# Altium PCB TI_EVM.PcbDoc
Units mil, origin at the board's own origin, x right, y up, seen from the top; angles counter-clockwise.
Board outline 3543.31 x 2299.21 mil, 2 copper layers (Top Layer, Bottom Layer); 66 components, 32 nets, 162 pads, 44 vias.
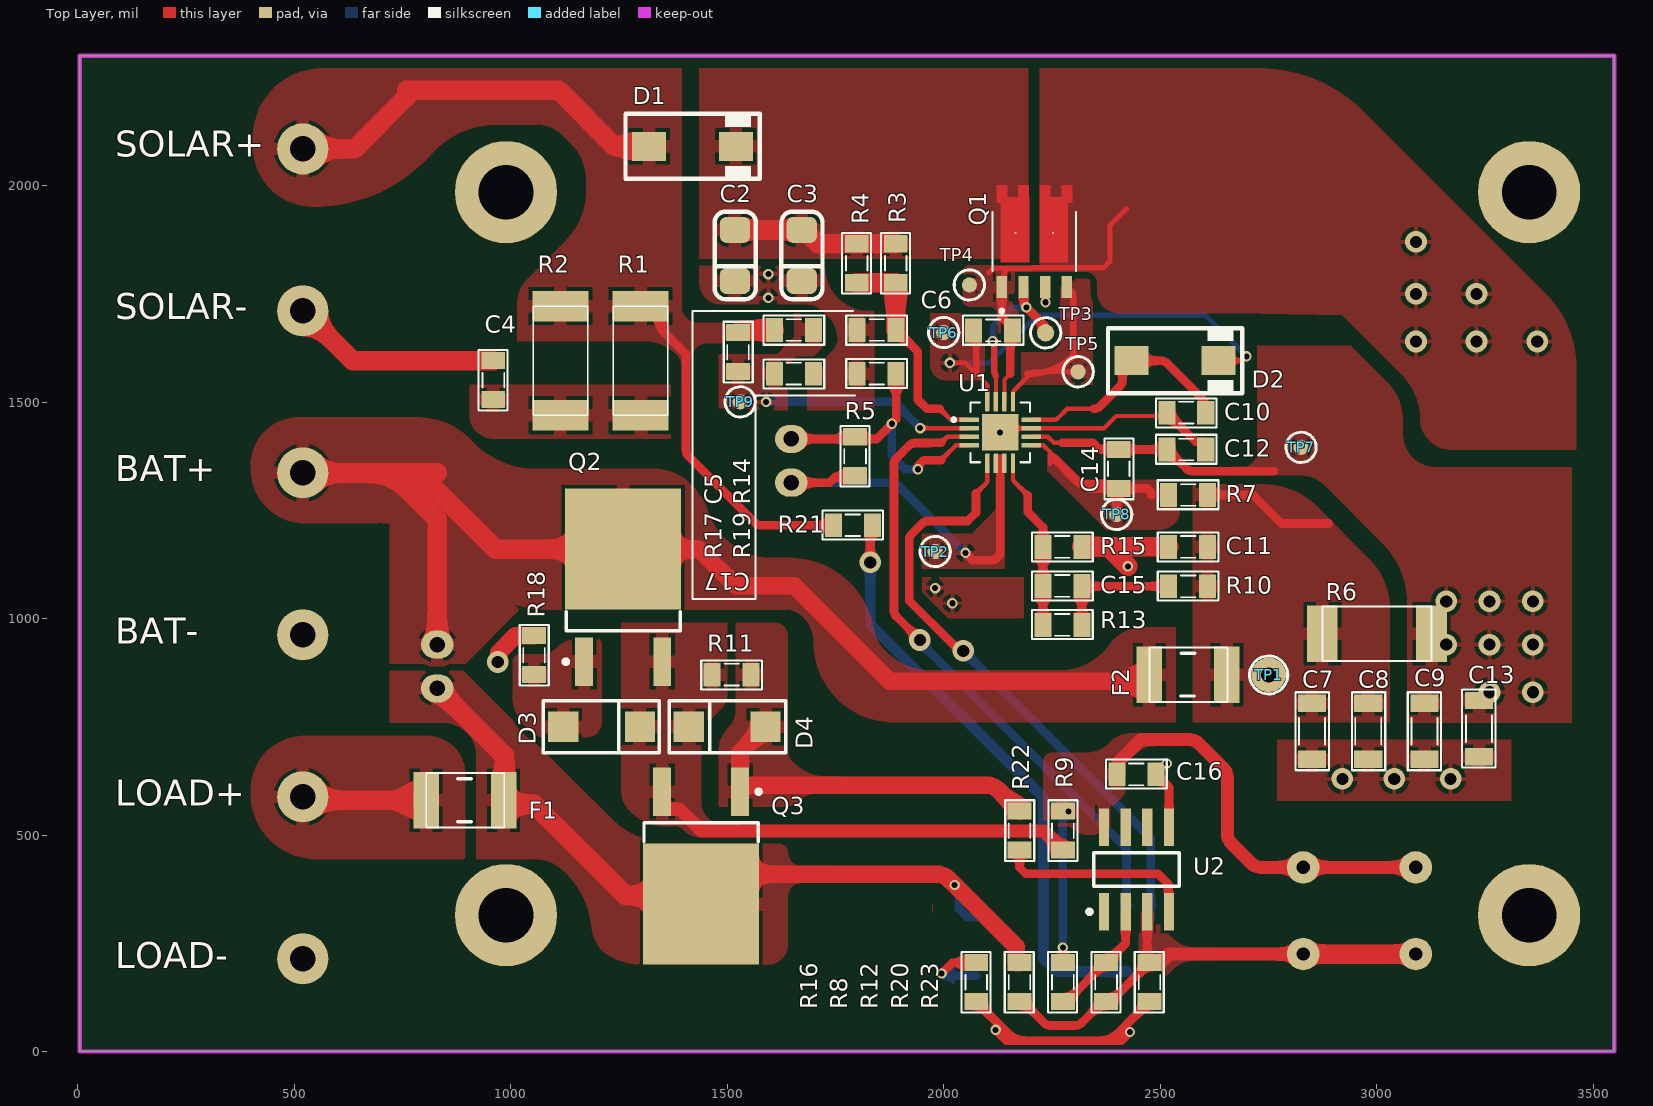
[diagram p0: Top Layer view]
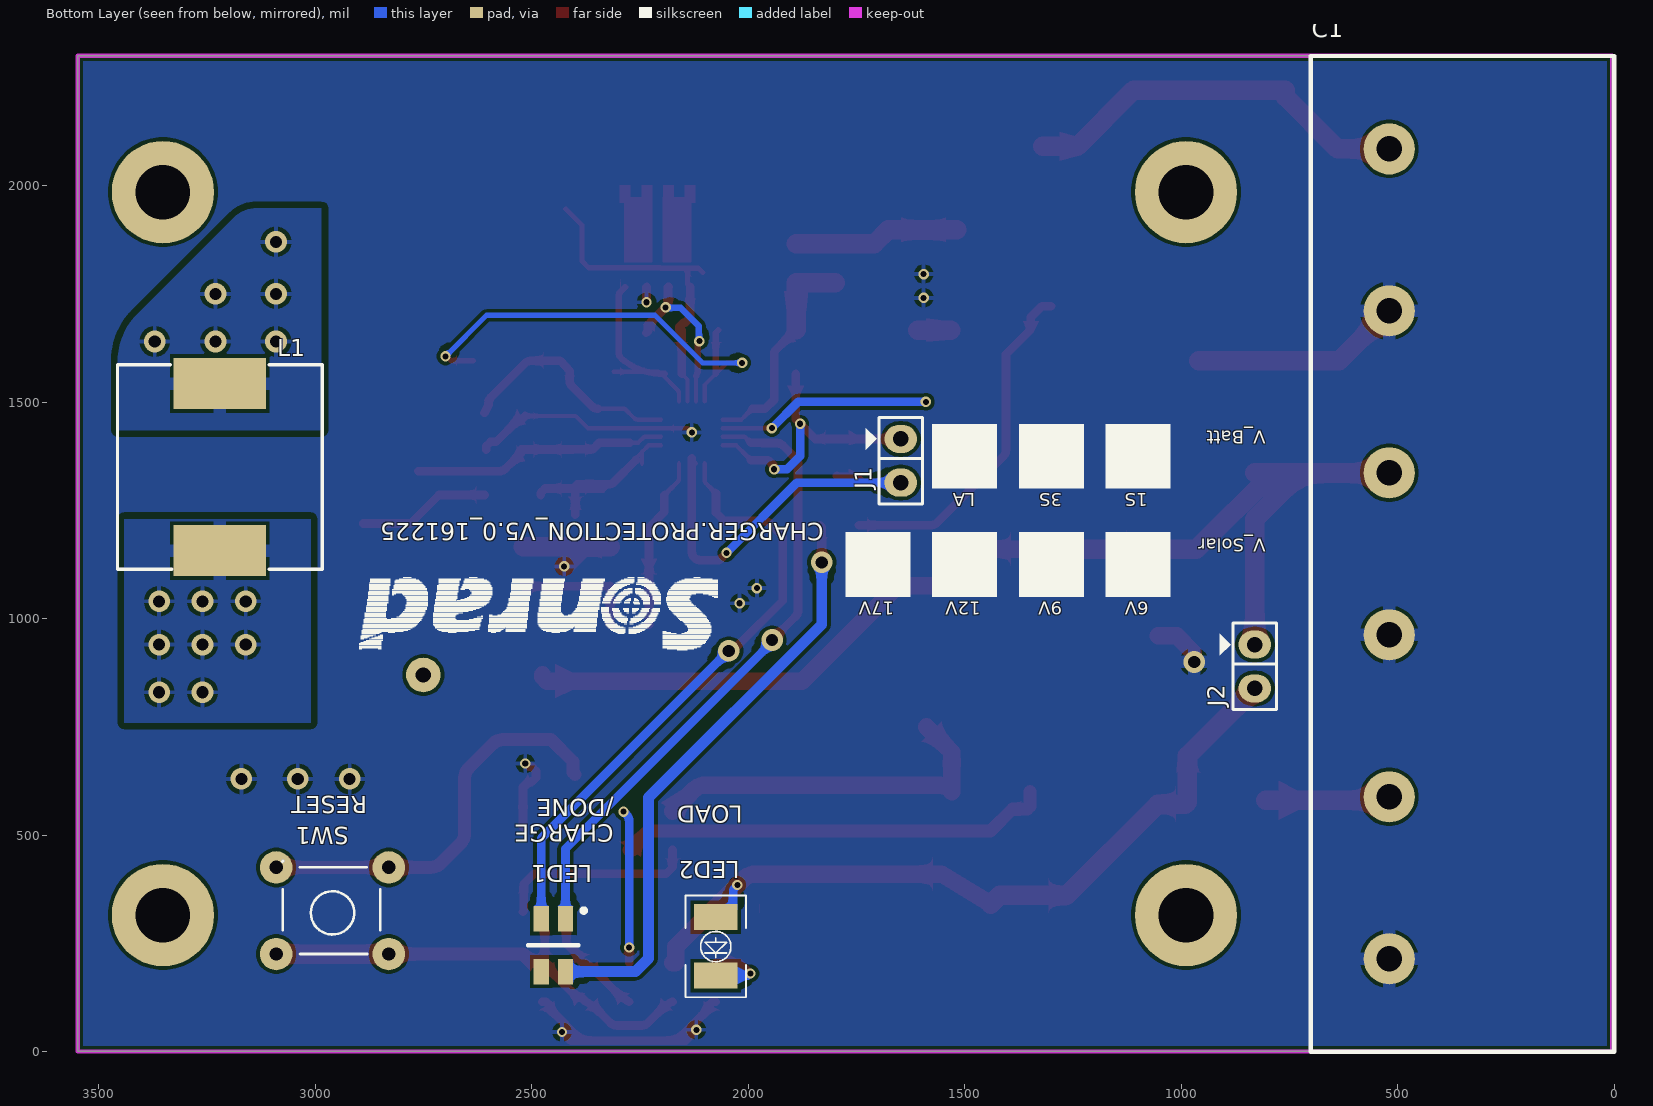
[diagram p1: Bottom Layer view, seen from below]
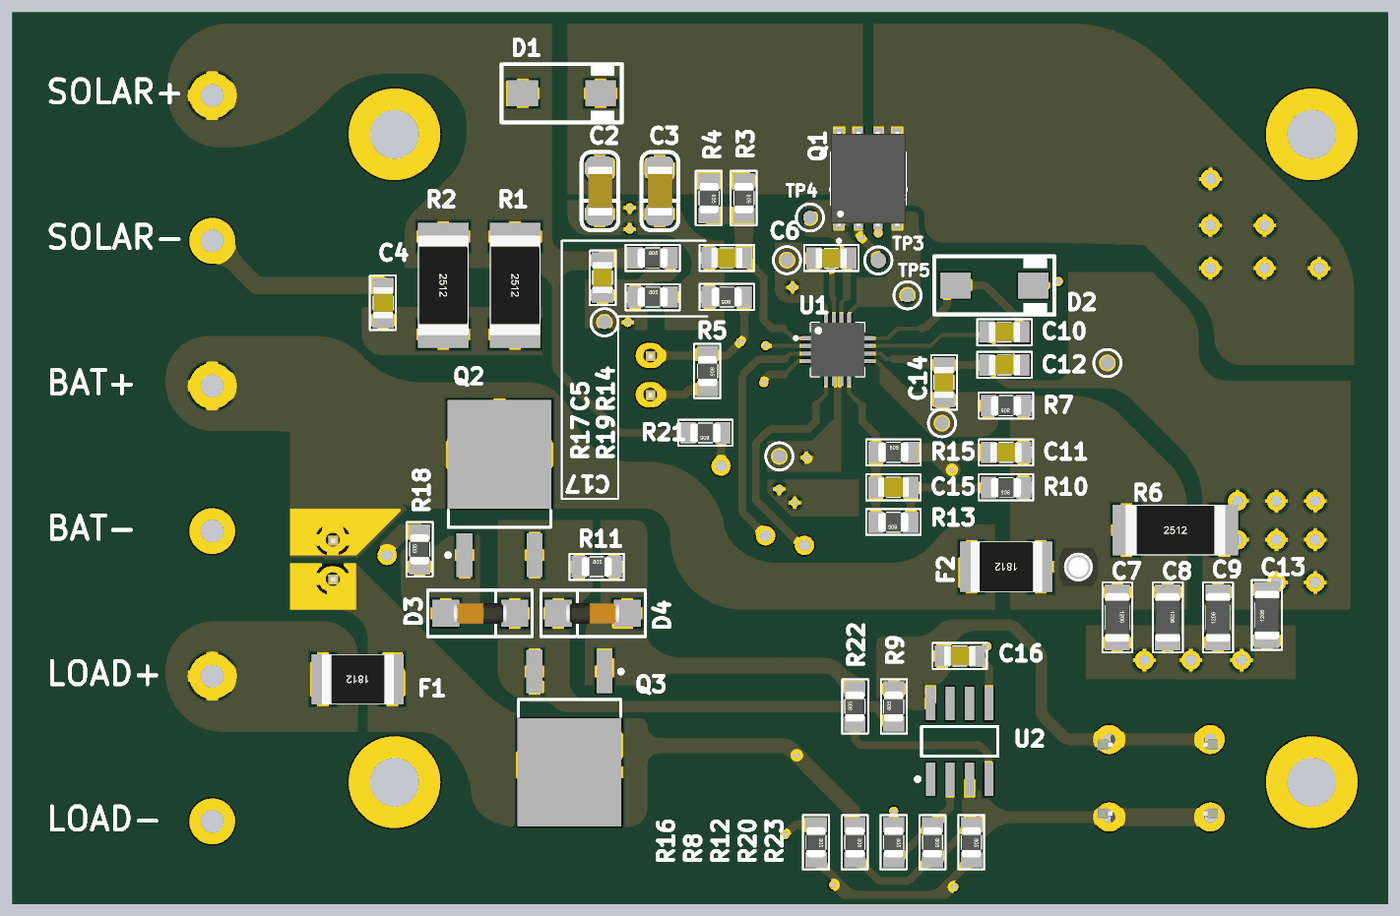
[diagram p2: 3D render of the assembled board from above, using the file's embedded part models]
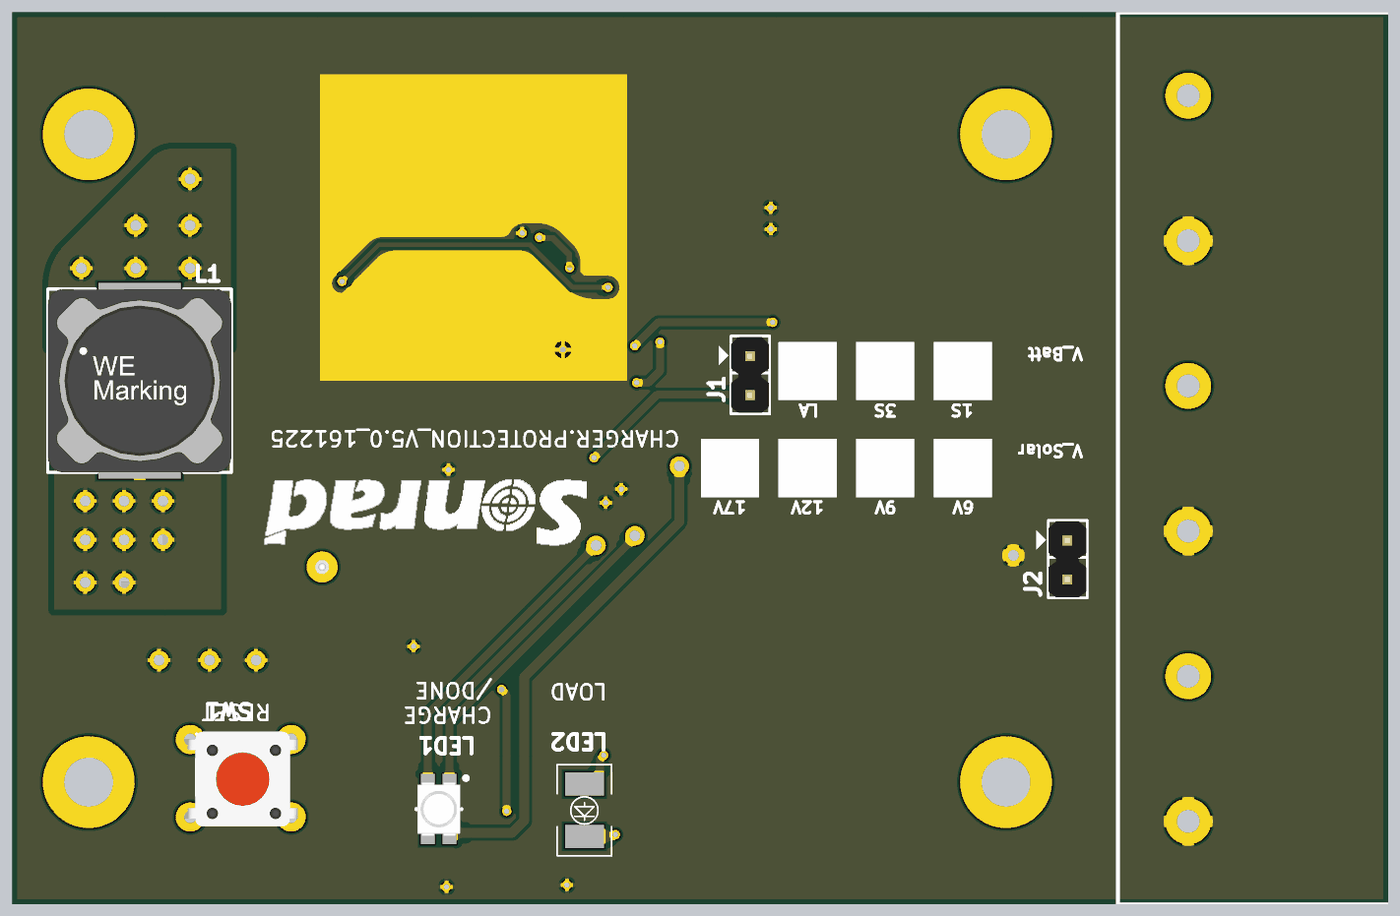
[diagram p3: 3D render of the assembled board from below, using the file's embedded part models]

## Layer stack, top to bottom
Top Solder: solder mask 0.4, Solder Resist, Dk 3.5
Top Layer: signal copper 1.4
Dielectric 1: dielectric 12.6, FR-4, Dk 4.8
Bottom Layer: signal copper 1.4
Bottom Solder: solder mask 0.4, Solder Resist, Dk 3.5

## Board outline
4.69,0.63 4.69,2299.84 3547.99,2299.84 3547.99,0.63

## Design rules (kind name [scope] priority, off if disabled: settings)
Clearance [All] p1: gap=8 ignorepadtopadclearanceinfootprint=FALSE except(0: Arc-Text Track-Text SMDPad-Text SMDPad-Hole THPad-THPad THPad-Text THPad-Hole Via-Text Via-Hole Fill-Text Fill-Hole Poly-Text Poly-Hole Region-Text Region-Hole Text-Text Text-Hole; 2: SMDPad-SMDPad SMDPad-THPad; 12: Arc-Via Track-Via SMDPad-Via THPad-Via Via-Via; 15: Fill-Fill Fill-Poly Fill-Region Poly-Poly Poly-Region Region-Region)
HoleSize [All] p1: absolutevalues=TRUE maxlimit=150 minlimit=1 maxpercent=80.000 minpercent=20.000
MinimumSolderMaskSliver [All] p1: minsoldermaskwidth=0
PlaneClearance [All] p1: clearance=15
PlaneConnect [All] p1: planeconnectstyle=Relief reliefexpansion=30 reliefentries=4 reliefconductorwidth=10 reliefairgap=10
PolygonConnect [All] p1: connectstyle=Relief reliefconductorwidth=30 reliefentries=4 polygonreliefangle="90 Angle" airgapwidth=8
RoutingVias [All] p1: holewidth=28 width=50 viastyle="Through Hole" minholewidth=10 minwidth=20 maxholewidth=28 maxwidth=50
SilkToSilkClearance [All] p1: silktosilkclearance=1
SilkToSolderMaskClearance [IsPad] p1: minsilkscreentomaskgap=0 clearancetoexposedcopper=TRUE
SolderMaskExpansion [All] p1: expansion=4 istentingtop=FALSE
SupplyNets "Schematic Supply Nets_1" [InNet('TERM_EN')] p1: voltage=0.000
SupplyNets "Schematic Supply Nets_5" [InNet('GND')] p2: voltage=0.000
Width [All] p1: maxlimit=45 minlimit=10 preferedwidth=20 bottomlayer_minwidth=12 minimp=50.000000 maximp=50.000000 favimp=50.000000
24 further rules are at their usual default settings.

## Components (designator, comment, footprint, x,y, rotation, side; value= is the part's Value field where it differs from the comment)
C1 "JP6" HB9500-6P 700.79,2299.21 r270 bottom locked
C2 "10uF" CAP_3216 1519.68,1840.63 r90 top value=33p
C3 "10uF" CAP_3216 1673.83,1840.63 r90 top value=33p
C4 "2.2uF" CAP_0805 959.68,1550.63 r270 top value=33p
C5 "0.1uF" CAP_0805 1844.68,1666.63 r0 top value=33p
C6 "1uF" CAP_0805 2113.83,1665.63 r180 top value=33p
C7 "4.7uF" CAP_1206 2850,740 r270 top value=33p
C8 "1uF" CAP_1206 2980,740 r270 top value=33p
C9 "10uF" CAP_1206 3110,740 r90 top value=33p
C10 "10uF" CAP_0805 2559.68,1475.63 r0 top value=33p
C11 "0.1uF" CAP_0805 2563.83,1165.63 r0 top value=33p
C12 "10uF" CAP_0805 2559.68,1390.63 r180 top value=33p
C13 "10uF" CAP_1206 3235.63,746.17 r90 top value=33p
C14 "10uF" CAP_0805 2403.83,1345.63 r90 top value=33p
C15 "0.1uF" CAP_0805 2273.83,1075.63 r0 top value=33p
C16 "0.47uF" CAP_0805 2444.68,640.63 r180 top value=33p
C17 "22pF" CAP_0805 1524.68,1615.63 r90 top value=33p
D1 "1N5824" SMA 1419.68,2090.63 r0 top value="Diode c?m 1N5408"
D2 "1N5819" SMA 2533.83,1595.63 r0 top value="Diode c?m 1N5408"
D3 "Zenner 12V" DIODE_ZENER_SMD 1209.68,750.63 r0 top
D4 "Zenner 12V" DIODE_ZENER_SMD 1499.68,750.63 r180 top
F1 "F5A" RES-SMD-1812 904.68,580.63 r180 top value=Fuse
F2 "F5A" RES-SMD-1812 2574.68,870.63 r180 top value=Fuse
J1 "Jumper 2" JP2 1647.5,1415 r270 bottom value="JP 2"
J2 "Jumper 2" JP2 830,940 r270 bottom value="JP 2"
L1 "15uH" L-SMD-M-12x10 3220,1350 r180 bottom value="150 mH"
LED1 "LED RGB SMD v1" "LED RGB 3528" 2449.68,246.04 r270 bottom locked
LED2 "LED" "LED 3512" 2074.68,310.63 r270 bottom locked value="LED 3 - 5 ly 2 Colour"
Q1 "SI7288" "SO-8 dual" 2208.83,1870.75 r90 top
Q2 "Sud50p06" TO-252 1259.53,1065.98 r90 top
Q3 "Sud50p06" TO-252 1439.53,435.28 r270 top
R1 "2R" RES-SMD-2512 1294.68,1595.63 r270 top
R2 "2R" RES-SMD-2512 1109.68,1595.63 r270 top
R3 "10R" RES-SMD-0805 1888.83,1820.63 r270 top
R4 "NC" RES-SMD-0805 1798.83,1820.63 r270 top
R5 "10k" RES-SMD-0805 1795,1375 r270 top
R6 "0.05" RES-SMD-2512 3000,960 r0 top
R7 "0R" RES-SMD-0805 2563.83,1285.63 r180 top
R8 "DFN" RES-SMD-0805 2174.68,160.63 r270 top
R9 "10R" RES-SMD-0805 2274.68,510.63 r90 top
R10 "0R" RES-SMD-0805 2563.83,1074.63 r180 top
R11 "1M" RES-SMD-0805 1509.68,870.63 r0 top
R12 "100k" RES-SMD-0805 2274.68,160.63 r270 top
R13 "499k" RES-SMD-0805 2273.83,985.63 r180 top
R14 "10k" RES-SMD-0805 1844.68,1565.63 r180 top
R15 "100k" RES-SMD-0805 2273.83,1165.63 r0 top
R16 "10k" RES-SMD-0805 2074.68,160.63 r270 top
R17 "499k" RES-SMD-0805 1653.83,1666.63 r0 top
R18 "100k" RES-SMD-0805 1053.68,915.63 r90 top
R19 "36k" RES-SMD-0805 1653.83,1565.63 r0 top
R20 "1M" RES-SMD-0805 2374.68,160.63 r270 top
R21 "1k" RES-SMD-0805 1789.68,1215.63 r180 top
R22 "100R" RES-SMD-0805 2174.68,510.63 r90 top
R23 "115k" RES-SMD-0805 2474.68,160.63 r270 top
SW1 "SW" SW4 2829.68,225.63 r0 bottom locked value="Button chip 4 pin"
TP1 "TP" TP1 2750,870 r0 top value="Test Point"
TP2 "TP" "Testpoint 50ml"#1 1980,1155 r0 top value="Test Point"
TP3 "TP" "Testpoint 50ml"#2 2235,1660 r0 top value="Test Point"
TP4 "TP" "Testpoint 50ml"#1 2058.83,1770.63 r0 top value="Test Point"
TP5 "TP" "Testpoint 50ml"#1 2310,1570 r0 top value="Test Point"
TP6 "TP" "Testpoint 50ml"#1 1999.68,1660.63 r0 top value="Test Point"
TP7 "TP" "Testpoint 50ml"#1 2824.68,1395.63 r0 top value="Test Point"
TP8 "TP" "Testpoint 50ml"#1 2398.83,1240.63 r0 top value="Test Point"
TP9 "TP" "Testpoint 50ml"#1 1529.68,1500.63 r0 top value="Test Point"
U1 "BQ24650" VQFN-16 2130,1430 r0 top
U2 "MAX8212" SOIC-8 2444.68,420.63 r90 top

## Footprints (in the part's own frame and the unit in brackets; to place one, negate y for a bottom-side part, rotate by r counter-clockwise, add the part's x,y. Pads: shape width x height; smd on the part's side, far side on the other; paste and mask are expansions set on the pad)
CAP_0805 [mil]
  rect 39.37x55 smd: 1(-45,0) 2(45,0)
  silkscreen extent -70,-34 70,33, body extent -40,-25 40,25, height 24
CAP_1206 [mil]
  rect 40x65 smd: 1(-65,0) 2(65,0)
  silkscreen extent -90,-38 90,39, body extent -63,-31 63,32, height 40
CAP_3216 [mil]
  rrect50% 60x70 smd: 1(-60.99,2) 2(56.99,2)
  silkscreen extent -103,-46 99,49, body extent -65,-30 61,32, height 39
DIODE_ZENER_SMD [mil]
  rect 70x70 smd: 1(-88.58,0) 2(88.58,0)
  silkscreen extent -135,-60 134,60, body extent -69,-29 69,29, height 57
HB9500-6P [mm]
  round 3 hole 1.5: 1(5.45,4.6) 2(14.95,4.6) 3(24.45,4.6) 4(33.95,4.6) 5(43.45,4.6) 6(52.95,4.6)
  silkscreen extent 0,0 58.4,17.8
JP2 [mil]
  oval 65x75 hole 36: 1(0,0) 2(101,0)
  silkscreen extent -50,-81 150,50, body extent -48,-50 148,48, height 323
L-SMD-M-12x10 [mm] "WE-PDA SMD Shielded Power Inductor, 1210"
  rect 5.4x3 smd: 1(0,4.9) 2(0,-4.9)
  silkscreen extent -6,-6 6,6, body extent -6,-6 6,6, height 9.7
"LED 3512" [mil]
  rect 60x100 smd: 1(-0.2,0) 2(134.8,0)
  silkscreen extent -50,-70 185,70, body extent -20,-60 155,60, height 75
"LED RGB 3528" [mm]
  rect 1.5x0.9 smd: 1(1.55,0.707) 2(1.55,-0.71) 3(-1.55,0.707) 4(-1.55,-0.707)
  silkscreen extent -2.15,-1.5 0.03,1.9, body extent -1.75,-1.4 1.75,1.4, height 1.87
RES-SMD-0805 [mil]
  rect 39.37x55 smd: 1(-45,0) 2(45,0)
  silkscreen extent -70,-34 70,33, body extent -39,-25 39,25, height 31
RES-SMD-1812 [mm] "Chip Capacitor, Body 3.2x2.5mm, IPC Medium Density"
  rect 1.5x3.3 smd: 1(-1.996,0) 2(2.54,0)
  silkscreen extent -2.04,-1.6 2.54,1.6, body extent -2,-1.6 2.5,1.6, height 0.6
RES-SMD-2512 [mm] "Chip Capacitor, Body 3.2x2.5mm, IPC Medium Density"
  rect 1.8x3.3 smd: 1(-3.2,0.127) 2(3.2,0.127)
  silkscreen extent -3.2,-1.47 3.2,1.73, body extent -3.2,-1.47 3.2,1.73, height 0.6
SMA [mm]
  rect 2x1.7 smd: 1(-2.544,0) 2(2.544,0)
  silkscreen extent -3.94,-1.9 3.94,1.91, body extent -2.87,-1.4 2.87,1.4, height 2.29
"SO-8 dual" [mm] "Dual N-channel"
  rect 1.27x0.61 smd: 1(-2.67,1.905) 2(-2.67,0.635) 3(-2.67,-0.635) 4(-2.67,-1.905)
  rect 0.1x0.1 smd paste-1 mask+0: 5_6_10(0.5,-1.1) 7_8_9(0.5,1.1)
  Top Layer region: 2.6,-0.33 3.305,-0.33 3.305,-0.94 2.6,-0.94 2.6,-1.6 3.305,-1.6 3.305,-2.21 2.285,-2.21 2.285,-1.955 -1.215,-1.955 -1.215,-0.305 2.6,-0.305
  Top Layer region: 3.305,1.6 2.6,1.6 2.6,0.94 3.305,0.94 3.305,0.33 2.6,0.33 2.6,0.305 -1.215,0.305 -1.215,1.955 2.285,1.955 2.285,2.21 3.305,2.21
  silkscreen extent -4.17,-2.45 1.72,2.45, body extent -3.07,-2.58 3.07,2.58, height 1.12
SOIC-8 [mm] "SOIC, 8-Leads, Body 5,0x4,0mm (max), Pitch 1,27mm, IPC Medium Density"
  rect 2.2x0.6 smd: 1(-2.475,1.905) 2(-2.475,0.635) 3(-2.475,-0.635) 4(-2.475,-1.905) 5(2.475,-1.905) 6(2.475,-0.635) 7(2.475,0.635) 8(2.475,1.905)
  silkscreen extent -2.6,-2.5 0.98,2.88, body extent -3.2,-2.5 3.2,2.5, height 1.75
SW4 [mil] "SW button 4pin, 250 x250 mil"
  round 75 hole 31: 1(0,0) 2(0,-200) 3(260,-200) 4(260,0)
  silkscreen extent 20,-215 245,0, body extent -31,-220 281,24, height 276
"Testpoint 50ml"#1 [mil]
  round 35 smd: 1(0,0)
  silkscreen extent -35,-35 35,35
"Testpoint 50ml"#2 [mil]
  round 40 smd: 1(0,0)
  silkscreen extent -35,-35 35,35
TO-252 [mm] "KVU D-PAK, 3-Pads, Body 6,2x6,7mm (max), IPC Medium Density"
  rect 2.85x1.05 smd: 1(-4.2,2.29) 3(-4.2,-2.29)
  rect 7.1x6.8 smd: 2(2.4,0)
  silkscreen extent -4.32,-3.35 -1.27,3.49, body extent -5.03,-3.35 5.08,3.35, height 2.4
TP1 [mil] "Test point"
  round 80 hole 35: 1(0,0)
  silkscreen extent -44,-44 44,44, body extent -50,-50 50,50, height 178
VQFN-16 [mm]
  rrect25% 1.143x0.26 smd: 1(-1.812,0.75) 2(-1.812,0.25) 3(-1.812,-0.25) 4(-1.812,-0.75) 9(1.812,-0.75) 10(1.812,-0.25) 11(1.812,0.25) 12(1.812,0.75)
  rrect25% 0.26x1.143 smd: 5(-0.75,-1.812) 6(-0.25,-1.812) 7(0.25,-1.812) 8(0.75,-1.812) 13(0.75,1.812) 14(0.25,1.812) 15(-0.25,1.812) 16(-0.75,1.812)
  rect 2.14x2.14 smd paste-0.39: 17(0,0)
  silkscreen extent -2.82,-1.75 1.75,1.75, body extent -1.75,-1.75 1.75,1.75, height 1

## Part data
C1: "WR-PHD 2.54 mm Angled Socket Header", Manufacturer="W¨¹rth Elektronik eiSos GmbH", partNo=613006143121, ComponentLink1 Description=Manufacturer, ComponentLink1URL=http://www.we-online.com, ComponentLink2 Description=Datasheet, ComponentLink2URL=http://katalog.we-online.de/em/datasheet/6130xx143121.pdf, Created by="Karrer Zheng", Created Date="29 March 2013", NoPins=06
C2 C3: library part CapSMD, "Capacitor", LatestRevisionDate=17-Jul-2002, LatestRevisionNote="Re-released for DXP Platform.", PackageReference=RAD-0.3, Published=8-Jun-2000, Publisher="Altium Limited"
C4 C5 C6 C10 C11 C12 C14 C15 C16 C17: library part CapSMD, "C_0805", LatestRevisionDate=17-Jul-2002, LatestRevisionNote="Re-released for DXP Platform.", PackageReference=RAD-0.3, Published=8-Jun-2000, Publisher="Altium Limited"
C7 C8 C9 C13: library part CapSMD, "C_1206", LatestRevisionDate=17-Jul-2002, LatestRevisionNote="Re-released for DXP Platform.", PackageReference=RAD-0.3, Published=8-Jun-2000, Publisher="Altium Limited"
D1: library part 1N5822, "SS54 Diode Schottky 5A 40V"
D2: library part 1N5822, "S4 Diode Schottky 1A 40V"
D3 D4: library part Zenner, "generic zenner diode"
F1 F2: library part Fuse, "Fuse 5A", Designed by=VanDungEvn
J1 J2: library part "JP 2"
L1: library part Inductor, "Inductor"
LED2: library part "LED SMD"
Q1: library part "Dual MOSFET-N", "Si7288"
Q2 Q3: library part MOSFET-P
R1 R2 R6: library part "Resistor - SMD", "R_2512", Manufacturer="Generic Components", Class=Passive, Published=08/06/2000, Publisher="Altium Hobart Technology Centre"
R3 R4 R5 R7 R8 R9 R10 R11 R12 R13 R14 R15 R16 R17 R18 R19 R20 R21 R22 R23: library part "Resistor - SMD", "R_0805", Manufacturer="Generic Components", Class=Passive, Published=08/06/2000, Publisher="Altium Hobart Technology Centre"
SW1: library part SW4, "Switch button 4 pin"
TP1: library part TP1, "Test Point"
TP2 TP3 TP4 TP5 TP6 TP7 TP8 TP9: library part TP_1, "Test Point"
U1: "BQ24650 Stand-Alone Synchronous Buck Battery Charge Controller for Solar Power / With Maximum Power Point Tracking"
U2: "Microprocessor Voltage Monitors  / with Programmable Voltage Detection"

## Free pads (board coordinates)
  round 236.22 hole 125.98: 14(988.94,315.59) 14(988.94,1984.88) 14(3351.14,315.59) 14(3351.14,1984.88)

## Via types
v1: diameter 24, hole 14, Top Layer to Bottom Layer, 23 vias
v2: diameter 50, hole 28, Top Layer to Bottom Layer, 21 vias

## Nets (pads, with @x,y where several pads share a name; then routed paths per layer and width w, separated by ;. In a path a pad name is that pad's centre, name@x,y a point inside that pad or via, vN(x,y) a via of type N, cw(c..) or ccw(c..) an arc to the next point about the centre after c; other vN are vias at no path point)
BTST: C6.2 D2.2 TP6.1 U1.16 | length 1087.4
  Top Layer w10: v1(2013.83,1590.63) 2049.37,1590.63 2100.47,1539.53 U1.16
  Top Layer w12: D2.2 2686.25,1595.63 2696.25,1605.63 v1(2698.83,1605.63)
  Top Layer w15: C6.2 2074.78,1659.68 2074.78,1565.63
  Bottom Layer w12: v1(2013.83,1590.63) 2104.68,1590.63 2214.68,1700.63 2603.83,1700.63 v1(2698.83,1605.63)
GND: C1.2 C1.4 C1.6 C2.1 C3.1 C4.1 C5.1 C7.2 C8.2 C9.1 C10.1 C11.1 C12.1 C13.1 C16.1 Q1.3 R14.2 R15.2 R16.2 R18.2 R19.2 R23.2 U1.11 U1.17 U2.5 | length 2203.8
  Top Layer w10: v1(2130,1430) 2139.57,1439.57 2183.68,1439.57 2183.96,1439.84 U1.11 2369.84,1439.84 2397.82,1467.82 C10.1@2514.68,1467.82
  Top Layer w20: R16.2 2082.5,115.63 2092.18,105.95 2092.18,98.13 2164.69,25.63 ; v1(2119.68,50.63) 2144.68,25.63 2164.69,25.63 ; Q1.3 2234.68,1764.77 v1(2234.68,1730.63) ; v1(2429.68,45.63) 2409.68,25.63 2384.68,25.63 ; R23.2 2466.87,115.63 2457.18,105.95 2457.18,98.13 2384.68,25.63 ; v1(2514.68,665.63) 2513.6,665.63 2506.1,658.13 2499.37,658.13 2489.69,648.44 C16.1 2489.69,632.82 2499.37,623.13 2507.19,623.13 2519.68,610.63 U2.5 ; C10.1@2514.68,1467.82 2524.37,1458.13 2532.18,1458.13 2582.18,1408.13 2595,1408.13 2604.69,1398.44 C12.1 ; 2164.69,25.63 2384.68,25.63
  Top Layer w40: v2(970,900) 971.91,901.91 971.91,921.91 1010.63,960.63 R18.2
  Top Layer w45: C1.2 634.68,1595.63 C4.1 ; R15.2 2384.68,1165.63 ; v1(2424.68,1120.63) 2384.68,1160.63 2384.68,1165.63 ; C11.1 2384.68,1165.63
  other v1: 2019.68,1035.63 1979.68,1070.63 1594.68,1740.63 1594.68,1795.63
  other v2: 2920,630 3040,630 3170,630
HIDRV: Q1.2 TP3.1 U1.15 | length 396.8
  Top Layer w10: U1.15 2120.16,1559.62
  Top Layer w15: v1(2112.51,1640.88) cw(c2100.77,1631.55) 2115.77,1631.55 2115.77,1573.11 ccw(c2130.77,1573.16) 2116.9,1567.45 2120.16,1559.62
  Top Layer w20: Q1.2 2184.96,1764.5 2184.96,1725.58 2190.54,1720 v1(2190.54,1718.91) ; v1@2191.31,1718.15 2231.17,1678.28 2231.17,1663.83 TP3.1
  Bottom Layer w15: v1(2112.51,1640.88) 2113.58,1641.95 2113.58,1675.38 2156.04,1717.85 2189.47,1717.85 v1(2190.54,1718.91)
LODRV: Q1.4 TP5.1 U1.13 | length 472.2
  Top Layer w10: U1.13 2159.65,1518.84 2159.66,1520.64 cw(c2169.66,1520.56) 2162.57,1527.61 2199.63,1564.67 cw(c2206.72,1557.62) 2199.71,1564.76 2202.14,1567.14 cw(c2209.14,1560) 2209.06,1570 ; 2209.1,1570 2234.34,1570 TP5.1
  Top Layer w15: 2192.89,1565.63 ccw(c2198.97,1706.73) 2293.96,1602.22 ccw(c2283.83,1613.28) 2298.83,1613.23 2298.83,1744.41 ccw(c2283.83,1744.41) 2294.44,1755.01 2288.33,1761.12 Q1.4
MPPSET: C17.1 R17.2 R19.1 TP9.1 U1.2 | length 494.2
  Top Layer w10: v1(1945,1440) 2038.71,1440 2038.75,1439.96 2058.54,1439.96 U1.2
  Bottom Layer w20: v1(1589.68,1500.63) 1884.37,1500.63 v1(1945,1440)
NetC1_5: C1.5 F1.2 | length 293
  Top Layer w45: C1.5 519.68,580.63 F1.2
NetC2_2: C2.2 C3.2 D1.2 Q1.7_8_9 R3.1 R4.1 | length 384.4
  Top Layer w45: C2.2 C3.2 1676.83,1897.62 1708.82,1865.63 R4.1 R3.1
NetC4_2: C4.2 R1.2 R2.2
NetC5_2: C5.2 R3.2 R4.2 U1.1 | length 523.7
  Top Layer w10: 1990,1485 2015.47,1459.53 U1.1
  Top Layer w20: C5.2@1888.83,1667.49 1888.83,1659.67 1899.37,1649.13 1907.18,1649.13 1939.68,1616.63 1939.68,1505.63 1960.32,1485 1990,1485
  Top Layer w45: R4.2 R3.2 C5.2@1888.83,1667.49
NetC7_1: C7.1 C8.1 C11.2 F2.1 R6.1 R7.1 R10.1 TP1.1 | length 307.3
  Top Layer w20: R7.1 2713.83,1285.63 2779.8,1219.65 2888.83,1219.65
NetC10_2: C10.2 D2.1 U1.12 | length 538.4
  Top Layer w10: U1.12 2255.39,1459.53 ccw(c2255.39,1469.53) 2261.39,1461.53 ccw(c2255.39,1469.53) 2262.44,1462.44 2284.68,1484.68 2346.4,1484.68
  Top Layer w20: 2346.4,1484.68 ccw(c2346.4,1504.68) 2358.4,1488.68 ccw(c2346.4,1504.68) 2360.5,1490.5 2406.25,1536.25 ccw(c2392.08,1550.36) 2412.08,1550.36 2412.08,1572.17 D2.1 2501.09,1595.63 cw(c2501.09,1575.63) 2515.2,1589.8 2593.62,1511.38 cw(c2579.45,1497.27) 2599.45,1497.27 2599.45,1493.13 C10.2@2608.83,1475.63
NetC15_1: C15.1 R13.2 R15.1 U1.8 | length 401.3
  Top Layer w10: U1.8 2159.53,1323.13 ccw(c2169.53,1323.13) 2162.44,1316.07 2193.39,1285.13
  Top Layer w20: 2193.39,1285.13 2193.39,1246.07 2228.83,1210.63 R13.2
NetC15_2: C15.2 R10.2 R13.1 | length 289
  Top Layer w20: R13.1 2318.83,1057.13 C15.2 ; C15.2@2319.83,1074.63 R10.2
NetC16_2: C16.2 R9.2 R12.1 SW1.2 SW1.3 U2.8 | length 1297.9
  Top Layer w20: R12.1 v1(2274.68,240.63)
  Top Layer w30: C16.2 2404.37,645.32 2404.37,670.32 2454.68,720.63 2566.94,720.63 cw(c2566.94,690.63) 2584.94,714.63 cw(c2566.94,690.63) 2588.13,711.87 2645.92,654.08 cw(c2624.68,632.89) 2648.68,650.89 cw(c2624.68,632.89) 2654.68,632.89 2654.68,502.74 ccw(c2684.68,502.74) 2660.69,484.74 ccw(c2684.69,502.74) 2663.45,481.55 2710.61,434.39 ccw(c2731.8,455.63) 2713.8,431.63 ccw(c2731.8,455.63) 2731.8,425.63 SW1.2 SW1.3
  Bottom Layer w20: v1(2274.68,240.63) 2274.68,532.97 cw(c2294.68,532.97) 2280.51,547.08 v1@2287.07,553.64
  other v1: 2287.83,554.4
NetD3_1: D3.1 Q2.1 R18.1
NetD3_2: D3.2 D4.2 Q2.3 Q3.3 R9.1 R11.1 | length 1006
  Top Layer w30: Q3.3 1349.37,566.09 1355.04,560.42 1389.58,560.42 1439.87,510.13 2230.18,510.13 2262.18,478.13 2262.18,470.31 2266.87,465.63 R9.1
NetD4_1: D4.1 Q3.1 R11.2 R22.2 | length 848.4
  Top Layer w40: Q3.1@1529.68,614.96 Q3.1 1530.35,606.34 1546.37,612.76 cw(c1561.25,575.63) 1561.25,615.63 2098.11,615.63 cw(c2098.11,575.63) 2126.4,603.91 R22.2 ; Q3.1@1529.68,615.63 1529.68,692.05 D4.1
NetJ1_1: J1.1 R5.1 R14.1 U1.4 | length 632.5
  Top Layer w10: 1993.33,1366.07 2027.73,1400.47 U1.4
  Top Layer w20: J1.1@1675,1415 1845,1415 v1(1880,1450) 1880,1451.08 1889.69,1460.77 R14.1 ; v1(1940,1345) 1940.77,1345.77 1940.77,1353.12 1953.72,1366.07 1993.33,1366.07
  Bottom Layer w20: v1(1880,1450) 1880,1375 1910,1345 v1(1940,1345)
NetLED1_1: LED1.1 R21.1 | length 1372.3
  Top Layer w20: v2(1830,1130) 1830,1210.94 R21.1
  Bottom Layer w25: v2(1830,1130) 1830,986.7 2229.68,587.02 2229.68,215.63 2260.3,185.02 LED1.1
NetLED1_3: LED1.3 U1.3 | length 1474.3
  Top Layer w10: 1993.83,1405.94 2008.04,1420.16 U1.3
  Top Layer w20: v2(1944.68,950.63) 1890.54,1004.77 1890.51,1004.81 cw(c1904.69,1018.91) 1888.69,1006.91 cw(c1904.68,1018.91) 1884.68,1018.91 1884.68,1356.4 cw(c1904.68,1356.4) 1888.68,1368.4 cw(c1904.69,1356.4) 1890.51,1370.51 1919.61,1399.61 cw(c1933.72,1385.44) 1933.72,1405.44 1968.83,1405.44 1993.83,1405.94
  Bottom Layer w20: v2(1944.68,950.63) 1944.68,945.63 2190.56,699.75 2421.83,468.48 LED1.3
NetLED1_4: LED1.4 U1.5 | length 1418.4
  Top Layer w10: 2074.28,1289.28 2097.56,1312.56 ccw(c2090.47,1319.61) 2098.47,1313.61 ccw(c2090.47,1319.61) 2100.47,1319.61 U1.5
  Top Layer w20: v2(2044.68,925.63) 2036.57,925.63 2021.94,940.25 2021.53,940.25 1919.68,1042.1 1919.68,1181.4 cw(c1939.68,1181.4) 1923.68,1193.4 cw(c1939.69,1181.4) 1925.51,1195.51 1949.81,1219.81 cw(c1963.91,1205.63) 1951.91,1221.63 cw(c1963.91,1205.63) 1963.91,1225.63 2054.68,1225.63 2074.28,1245.22 2074.28,1289.28
  Bottom Layer w20: v2(2044.68,925.63) 2477.54,492.78 LED1.4
NetLED2_2: LED2.2 R16.1 | length 172.3
  Top Layer w20: v1(1994.68,180.63) 2019.69,205.63 R16.1
  Bottom Layer w20: v1(1994.68,180.63) 1995.77,180.63 2000.56,175.83 LED2.2
NetR8_2: R8.2 R20.2 R23.1 SW1.1 SW1.4 U2.3 | length 1125.6
  Top Layer w20: R8.2 2192.18,105.95 2231.68,66.45 ccw(c2245.79,80.63) 2233.79,64.63 ccw(c2245.79,80.63) 2245.79,60.63 2303.58,60.63 ccw(c2303.58,80.63) 2315.58,64.63 ccw(c2303.58,80.63) 2317.69,66.45 2357.18,105.95 R20.2 2384.37,125.32 2394.37,125.32 2457.18,188.13 2457.18,195.95 2466.87,205.63 R23.1 2469.68,210.63 U2.3
  Top Layer w30: R23.1 2477.05,207.99 2502.05,207.99 2519.68,225.63 SW1.1
  Top Layer w45: SW1.1 SW1.4
NetR12_2: R12.2 R20.1 U2.2 | length 276
  Top Layer w20: R12.2 2292.18,125.32 2362.81,195.95 R20.1 2382.5,205.63 2392.18,215.32 2392.18,223.13 2419.68,250.63 U2.2
NetR22_1: R22.1 U2.4 | length 464
  Top Layer w20: R22.1 2174.68,425.63 2189.68,410.63 2494.69,410.63 2517.87,387.44 2517.87,325 U2.4
PH: C6.1 L1.1 Q1.1 Q1.5_6_10 TP4.1 U1.14 | length 761.9
  Top Layer w10: U1.14 2139.84,1551.96 2153.52,1565.63
  Top Layer w12: 2104.81,1799.08 2114.65,1808.91 2147.11,1808.91 ; Q1.1 2139.83,1771.64 2139.83,1801.64 2147.11,1808.91 ; 2420.91,1945.63 2383.81,1908.53 2383.81,1825.62 2368.44,1810.24 2203.94,1810.24 2202.62,1808.91 2147.11,1808.91
  Top Layer w20: Q1.1 2133.83,1694.85 2145.54,1683.13 2149.14,1683.13 2158.83,1673.44 C6.1 2153.52,1665.63 2153.52,1565.63
  other v2: 3090,1640 3230,1640 3370,1640 3090,1750 3230,1750 3090,1870
SRN: C14.1 R7.2 TP8.1 U1.9 | length 579.1
  Top Layer w10: U1.9 2229.53,1400.47 2245,1385 ; 2245,1357.53 2245,1385 ; C14.1@2398.83,1295.63 2334.37,1295.63 2245,1385
  Top Layer w20: 2258.73,1366.27 2308.87,1316.13 ccw(c2322.97,1330.31) 2310.97,1314.31 ccw(c2322.97,1330.31) 2322.97,1310.31 2394.14,1310.31 C14.1 2469.14,1300.63 2478.83,1290.94 2478.83,1285.63 ; TP8.1 C14.1@2398.83,1295.63
SRP: C9.2 C12.2 C13.2 C14.2 L1.2 R6.2 TP7.1 U1.10 | length 596.7
  Top Layer w10: U1.10 2239.84,1420.16 2254.06,1405.94 2273.83,1405.94
  Top Layer w20: 2273.83,1405.94 2343.52,1405.94 2358.04,1391.41 2403.04,1391.41 C14.2 2523.83,1390.63 2523.83,1382.81 2524.37,1382.27 2560.19,1346.45 ccw(c2574.3,1360.63) 2562.3,1344.63 ccw(c2574.3,1360.63) 2574.3,1340.63 2761.4,1340.63
  other v2: 3260,830 3360,830 3160,940 3260,940 3360,940 3160,1040 3260,1040 3360,1040
TERM_EN: J1.2 R5.2 TP2.1 U1.6 U1.7 | length 891.9
  Top Layer w10: U1.6 2130,1358.66
  Top Layer w20: J1.2@1675,1314 1736,1314 1749.22,1327.22 1792.21,1327.22 R5.2 ; v1(2050,1151.74) 2066.74,1135 2110,1135 ccw(c2110,1155) 2130,1155 2130,1358.66 2130,1369.87
  Bottom Layer w20: J1.2@1675,1314 1887.74,1314 v1(2050,1151.74)
V_BATT: C1.3 F2.2 J2.1 Q2.2 | length 3118.4
  Top Layer w40: Q2.2 1434.68,1160.47 1519.53,1075.63 1654.68,1075.63 1874.68,855.63 2465.16,855.63 2474.68,865.16 F2.2
  Top Layer w45: J2.1 830,1230 723.39,1336.61 C1.3 ; 830,1336.61 C1.3 ; Q2.2 964.84,1160.47 789.68,1335.63 520.67,1335.63 C1.3
V_LOAD: F1.1 J2.2 LED2.1 Q3.2 R8.1 | length 1844.3
  Top Layer w40: Q3.2 1553.39,410 1983.38,410 cw(c1983.3,370) 2011.44,398.43 v1(2025,385) 2167.18,242.81 2167.18,205.95 2167.5,205.63 R8.1
  Top Layer w45: J2.2 985.84,683.16 985.84,575.83 990.29,571.39 1053.93,571.39 1264.53,360.79 1419.53,360.79 Q3.2
  Bottom Layer w20: v1(2025,385) 2025,383.92 2034.68,374.23 2034.68,330.83 2054.68,310.83 LED2.1
V_SOLAR: C1.1 C17.2 D1.1 R1.1 R2.1 R17.1 R21.2 | length 1799.9
  Top Layer w20: R1.1 1321.99,1721.61 1347.43,1696.17 1347.43,1667.89 1404.68,1610.63 1404.68,1388.85 ccw(c1424.68,1388.91) 1410.49,1374.82 1563.89,1221.42 ccw(c1577.97,1235.63) 1577.88,1215.63 R21.2
  Top Layer w45: C1.1 638.7,2084.65 759.68,2205.63 759.68,2220.63 1109.69,2220.63 1239.69,2090.63 D1.1 ; C17.2@1531.87,1665.63 R17.1@1608.83,1665.63
pads on no net: LED1.2 U2.1 U2.6 U2.7

## Polygon pours and split planes (outlines as drawn)
V_LOAD on Top Layer "NONET_L01_P-001" (solid, pour order 29): 841.26,759.68 720.32,759.69 720.32,879.69 890.63,879.69 951.56,818.75 1143.28,627.03 1231.72,538.6 ccw(c1372.43,679.32) 1372.43,480.32 1619.69,480.32 cw(c1619.69,460.01) 1640,460 ccw(c1670.31,460) 1670.31,429.69 1750,429.69 1750,389.69 1670.31,389.69 ccw(c1670.31,359.38) 1640,359.37 1640,250.32 cw(c1590.01,250.3) 1590.01,200.32 1309.35,200.32 cw(c1309.34,367.73) 1214.36,229.87 cw(c1282.67,298.18) 1186.21,292.96 ccw(c978.08,265.32) 1126.54,413.78 ccw(c1051.16,338.4) 1051.16,445 920,445 920,685.86 ccw(c849.66,685.86) 899.39,735.61 ccw(c841.27,677.49)
V_BATT on Top Layer "NONET_L01_P-001" (solid, pour order 32): 1601.78,1140.63 1642.26,1140.63 cw(c1642.27,941.69) 1782.97,1082.35 cw(c1642.4,941.74) 1835.55,988.9 ccw(c1938,997.73) 1865.29,925.02 ccw(c1972.47,1032.2) 1972.47,880.63 2266.17,880.63 ccw(c2266.17,1024.18) 2383.16,940.99 cw(c2458.76,887.23) 2458.76,980 2535,980 2535,760.63 1884.18,760.63 cw(c1884.17,945.12) 1699.68,945.12 ccw(c1616.95,945.14) 1675.44,1003.66 ccw(c1634.51,962.77) 1634.48,1020.63 1085.49,1020.63 cw(c1085.49,1264) 913.4,1091.91 850.89,1154.42 ccw(c692.58,996.12) 692.57,1220 525,1220 cw(c525,1345.31) 399.68,1345.32 399.68,1354.68 cw(c510,1354.68) 510,1465 784.65,1465 cw(c784.65,1293.3) 910.29,1410.33 ccw(c1058.99,1548.86) 1058.99,1345.63 1333.47,1345.63 cw(c1333.51,1234.16) 1412.36,1312.95 1419.76,1305.56 cw(c1317.62,1203.31) 1453.51,1252.5 ccw(c1741.82,1357.09) 1462.56,1230.31 ccw(c1601.78,1293.54)
PH on Top Layer "PH_L01_P000" (solid, pour order 0): 3100,1462.43 ccw(c2961.02,1462.43) 3059.29,1560.71 2920,1700 2670,1705.63 2403.82,1705.63 cw(c2403.82,1755.62) 2353.83,1755.63 2353.82,1775.63 ccw(c2328.83,1775.64) 2328.83,1800.63 2163.83,1800.63 2163.83,1732.7 ccw(c2205.04,1732.7) 2175.9,1703.56 2183.83,1695.63 2183.83,1630.63 2163.83,1630.63 2163.83,1575.63 2143.83,1575.63 2143.83,1630.63 2123.83,1630.63 2123.82,1700.63 ccw(c2103.83,1700.63) 2103.83,1720.63 2058.83,1720.63 cw(c2058.82,1735.63) 2043.83,1735.63 2043.83,1800.63 cw(c2058.82,1800.63) 2058.83,1815.63 2221.82,1815.63 2221.82,2270.63 2683.83,2270.63 2727.77,2270.63 cw(c2727.77,1928.78) 2969.5,2170.5 3387.57,1752.43 cw(c3212.72,1577.57) 3460,1577.57 3460,1390 3172.43,1390 cw(c3172.42,1462.42)
V_BATT on Top Layer "NONET_L01_P-001" (solid, pour order 47): 890,890 1020,1020 789.37,1250.63 720.2,1250.63 720.2,890.2 720,890
GND on Top Layer "NONET_L01_P-001" (solid, pour order 46): 3310,720 2770,720 2770,580 3310,580
NetC7_1 on Top Layer "NONET_L01_P-001" (solid, pour order 20): 2861.75,1258.56 2981.49,1138.82 cw(c2864.39,1021.72) 3030,1021.72 3030,760.63 2574.68,760.63 2574.68,1310.63 2736.05,1310.63 cw(c2736.05,1132.87)
BTST on Top Layer "NONET_L01_P-001" (solid, pour order 2): 1968.83,1705.63 1968.83,1585.63 ccw(c2003.83,1585.63) 2003.83,1550.63 2093.83,1550.63 2093.83,1705.63
NetC2_2 on Top Layer "NONET_L01_P-001" (solid, pour order 3): 1434.68,2270.63 1434.68,1830.63 2194.68,1830.63 2194.68,2270.63
SRN on Top Layer "NONET_L01_P-001" (solid, pour order 6): 2544.68,1320.63 2544.68,1250.63 cw(c2499.69,1250.63) 2499.68,1205.63 2374.37,1205.63 2238.83,1341.17 2238.83,1380.63 2259.77,1380.63 2319.77,1320.63
TERM_EN on Top Layer "NONET_L01_P-001" (solid, pour order 8): 2140,1325.63 2140,1115.63 1948.83,1115.63 1948.83,1195.63 2063.83,1195.63 2120,1251.8 2120,1325.63
SRP on Top Layer "NONET_L01_P-001" (solid, pour order 9): 3081.44,1372.39 ccw(c3135.49,1426.44) 3135.49,1350 3450,1350 3450,760 3070,760 3070,1037.57 ccw(c2878.35,1037.57) 3013.87,1173.09 2878.95,1308.01 ccw(c2824.34,1253.4) 2824.34,1330.63 2668.83,1330.63 2668.83,1350.63 2688.82,1350.63 ccw(c2688.83,1385.62) 2723.83,1385.63 2723.83,1630 2940,1630 3021.68,1548.32 cw(c2929.17,1455.81) 3060,1455.81 3060,1424.14 ccw(c3133.19,1424.14)
LODRV on Top Layer "NONET_L01_P-001" (solid, pour order 12): 2250.63,1615.63 2178.83,1615.63 2178.83,1585.63 2178.83,1540 2343.83,1540 2343.83,1765.63 ccw(c2318.83,1765.63) 2318.83,1790.63 2268.83,1790.63 2268.83,1633.83
NetC16_2 on Top Layer "NONET_L01_P-001" (solid, pour order 21): 2424.68,670.63 2439.08,685.02 cw(c2488.82,635.28) 2488.83,705.63 2519.68,705.63 2519.68,735.63 2433.83,735.63 ccw(c2433.82,665.28) 2384.08,715.02 2380.29,711.24 cw(c2330.54,760.98) 2330.54,690.63 2249.68,690.63 ccw(c2249.68,670.63) 2229.68,670.63 2229.68,535.63 ccw(c2244.68,535.63) 2244.68,520.63 2280.54,520.63 cw(c2280.55,486.51) 2304.68,510.63 ccw(c2328.83,534.77) 2328.83,500.63 2384.68,500.63 2384.68,560.63 2407.61,583.56 ccw(c2366.41,624.77) 2424.68,624.77
NetD3_2 on Top Layer "NONET_L01_P-001" (solid, pour order 25): 1275.54,554.77 cw(c1325.89,605.12) 1254.69,605.12 1254.68,990.63 1499.68,990.63 1499.68,827.7 cw(c1446.41,827.7) 1484.08,790.02 1439.68,745.63 1439.68,575.63 ccw(c1489.68,575.63) 1489.68,525.63 1529.68,525.63 1529.68,495.63 1438.83,495.63 cw(c1438.83,553.91) 1397.61,512.7 ccw(c1378.48,493.58) 1378.47,520.63 1357.97,520.63 cw(c1357.97,637.2)
NetD4_1 on Top Layer "NONET_L01_P-001" (solid, pour order 27): 1519.68,990.63 1519.68,787.7 cw(c1466.4,787.7) 1504.08,750.02 ccw(c1562.97,691.13) 1479.68,691.13 1479.68,565.63 1629.33,565.63 ccw(c1629.33,626.84) 1672.61,583.56 cw(c1701.76,554.42) 1701.76,595.63 1764.68,595.63 1764.68,635.63 1730.9,635.63 cw(c1730.9,747.2) 1652.01,668.31 cw(c1681.76,698.06) 1639.68,698.06 1639.68,960.63 ccw(c1609.68,960.63) 1609.68,990.63
NetD3_1 on Top Layer "NONET_L01_P-001" (solid, pour order 28): 1022.18,918.13 1071.58,918.13 ccw(c1071.58,967.88) 1106.76,932.7 cw(c1162.11,877.35) 1162.11,955.63 1194.68,955.63 cw(c1194.68,940.63) 1209.68,940.63 1209.68,760.63 cw(c1174.69,760.63) 1174.68,725.63 1081.76,725.63 cw(c1081.76,778.91) 1044.08,741.24 1033.83,751.49 cw(c1104.18,821.84) 1004.68,821.84 1004.68,900.63 cw(c1022.18,900.63)
NetC1_5 on Top Layer "NONET_L01_P-001" (solid, pour order 30): 894.68,640.31 894.68,445 550,445 cw(c550,595.31) 399.68,595.32 399.69,604.68 cw(c525,604.69) 525,730 805,730 cw(c805,640.32)
V_SOLAR on Top Layer "NONET_L01_P-001" (solid, pour order 33): 1431.79,1683.53 1556.79,1683.53 1559.68,1680.63 1559.68,1635.63 1454.68,1635.63 ccw(c1454.68,1595.63) 1414.68,1595.63 1414.68,1550.63 1394.68,1550.63 1394.68,1583.56 ccw(c1360.47,1583.56) 1384.66,1607.75 1382.42,1610 ccw(c1308.47,1536.06) 1308.47,1640.63 1014.68,1640.63 1014.68,1726.49 cw(c1097.11,1726.49) 1038.83,1784.77 1126.4,1872.35 ccw(c1009.84,1988.91) 1174.68,1988.91 1174.68,2012.35 ccw(c1058.14,2012.36) 1140.54,2094.77 1118.83,2116.49 ccw(c1060.55,2058.23) 1060.54,2140.63 967.11,2140.63 ccw(c967.1,1941.66) 826.4,2082.35 800.75,2056.7 cw(c544.69,2312.75) 544.68,1950.63 cw(c544.68,2090.63) 404.68,2090.63 404.68,2110.63 cw(c564.68,2110.63) 564.68,2270.63 1394.68,2270.63 1394.68,1720.63 ccw(c1431.79,1720.63)
NetC4_2 on Top Layer "NONET_L01_P-001" (solid, pour order 35): 904.68,1540.63 1369.68,1540.63 1369.68,1415.63 959.68,1415.63 cw(c959.68,1470.63) 904.68,1470.63
NetR8_2 on Top Layer "NONET_L01_P-001" (solid, pour order 38): 2449.68,315.63 2449.68,195.63 2414.68,160.63 2429.68,145.63 2444.68,160.63 2499.68,160.63 2529.08,190.02 cw(c2578.83,140.28) 2578.83,210.63 2624.68,210.63 2624.68,240.63 2579.68,240.63 cw(c2579.68,313.06) 2528.47,261.84 2489.68,300.63 2489.68,315.63
GND on Top Layer "NONET_L01_P-001" (solid, pour order 40): 1756.5,1738.81 ccw(c1824.54,1806.84) 1824.54,1710.63 1839.68,1710.63 1839.68,1480.63 1684.68,1480.63 1684.68,1560.63 1743.47,1619.42 ccw(c1716.4,1646.49) 1754.68,1646.49 ccw(c1684.33,1646.49) 1734.08,1696.24 1721.76,1708.56 ccw(c1680.54,1667.35) 1680.54,1725.63 1482.97,1725.63 cw(c1482.97,1769.77) 1451.76,1738.56 cw(c1492.97,1779.77) 1434.68,1779.77 1434.68,1815.63 1724.68,1815.63 ccw(c1833.32,1815.63)
MPPSET on Top Layer "NONET_L01_P-001" (solid, pour order 41): 1654.68,1705.63 1724.68,1705.63 1724.68,1630.63 1699.68,1605.63 1659.68,1605.63 1639.68,1585.63 1639.68,1480.63 1504.68,1480.63 1499.68,1485.63 1479.68,1485.63 1479.68,1610.63 1614.68,1610.63 1654.68,1650.63
GND on Top Layer "NONET_L01_P-001" (solid, pour order 42): 2184.68,1095.63 2184.68,995.63 2179.68,1000.63 2009.68,1000.63 1949.68,1060.63 1949.68,1095.63
PH on Bottom Layer "NONET_L01_P-001" (solid, pour order 39): 3187.15,1925.87 3411.83,1701.19 cw(c3307.36,1596.72) 3455.11,1596.72 3455.11,1435 2985.11,1435 2985.11,1605 2985.11,1947.91 3133.93,1947.91 cw(c3133.93,1872.65)
SRP on Bottom Layer "NONET_L01_P-001" (solid, pour order 44): 3010,760 3010,1230 3440,1230 3440,760
GND on Bottom Layer "NONET_L01_P-001" (solid, remove dead copper, pour order 45): 3544.68,2300.63 4.69,2300.63 4.69,0.63 3544.68,0.63
no net on Bottom Solder "NONET_L01_P-001" (solid): 2755.2,2139.38 1965.2,2139.38 1965.2,1349.38 2755.2,1349.38
V_LOAD on Top Solder "NONET_L01_P-001" (solid): 720,880 720,760 890,760 890,880
V_BATT on Top Solder "NONET_L01_P-001" (solid): 720,900 890,900 1010,1020 720,1020

## Keep-outs
Keep-Out Layer:
  the board outline again, w10

## Silkscreen, mask and mechanical layers (free items; w line width, h text height)
Top Overlay:
  lines w5: 1789.68,1710.63 1419.68,1710.63 1419.68,1305.63 1419.68,1045.63 1564.68,1045.63 1564.68,1310.63 1564.68,1515.63 1794.68,1515.63
  text "SOLAR+" at 86.23,2066.26 h60
  text "SOLAR-" at 86.23,1691.55 h60
  text "BAT+" at 86.23,1316.84 h60
  text "BAT-" at 86.23,942.14 h60
  text "LOAD+" at 86.23,567.43 h60
  text "LOAD-" at 86.23,192.72 h60
Bottom Overlay:
  drawing of 592 lines, arcs and shapes, not listed
  text "V_Batt" at 805.03,1434 h30 r180
  text "1S" at 1077.51,1289 h30 r180
  text "3S" at 1275.01,1289 h30 r180
  text "LA" at 1475.01,1289 h30 r180
  text "CHARGER.PROTECTION_V5.0_161225" at 1825,1220 h39.37 r180
  text "V_Solar" at 805.03,1184 h30 r180
  text "6V" at 1075.01,1039 h30 r180
  text "9V" at 1275.01,1039 h30 r180
  text "12V" at 1462.51,1039 h30 r180
  text "17V" at 1662.51,1039 h30 r180
  text "RESET" at 2880,590 h39.37 r180
  text "CHARGE / /DONE" at 2310.18,583.31 h39.37 r180
  text "LOAD" at 2012.8,568.29 h39.37 r180
Bottom Solder:
  pour cut-out: 1984.69,1590.63 ccw(c2014.68,1590.62) 2014.68,1560.63 2046.4,1560.63 ccw(c2046.4,1677.19) 2128.83,1594.77 2204.08,1670.02 cw(c2241.75,1632.35) 2241.76,1685.63 2560.54,1685.63 cw(c2560.55,1615.29) 2610.29,1665.02 2698.71,1576.6 ccw(c2700.57,1600.64) 2717.61,1617.7 2631.76,1703.56 ccw(c2590.56,1662.38) 2590.54,1720.63 2288.83,1720.63 cw(c2288.83,1754.77) 2277.45,1722.58 cw(c2283.83,1740.63) 2266.72,1732.04 ccw(c2228.48,1712.83) 2228.47,1755.63 2193.83,1755.63 ccw(c2193.82,1673.21) 2135.54,1731.49 2104.18,1700.13 ccw(c2151.25,1653.06) 2084.68,1653.06 2084.68,1630.63 2074.68,1620.63 2014.68,1620.63 ccw(c2014.68,1590.64)